# Altium PCB Measuring_distance_ultrasonic_PCB.PcbDoc
Units mil, origin at the board's own origin, x right, y up, seen from the top; angles counter-clockwise.
Board outline 1525 x 3215 mil, 2 copper layers (Top Layer, Bottom Layer); 12 components, 14 nets, 69 pads, 1 vias.
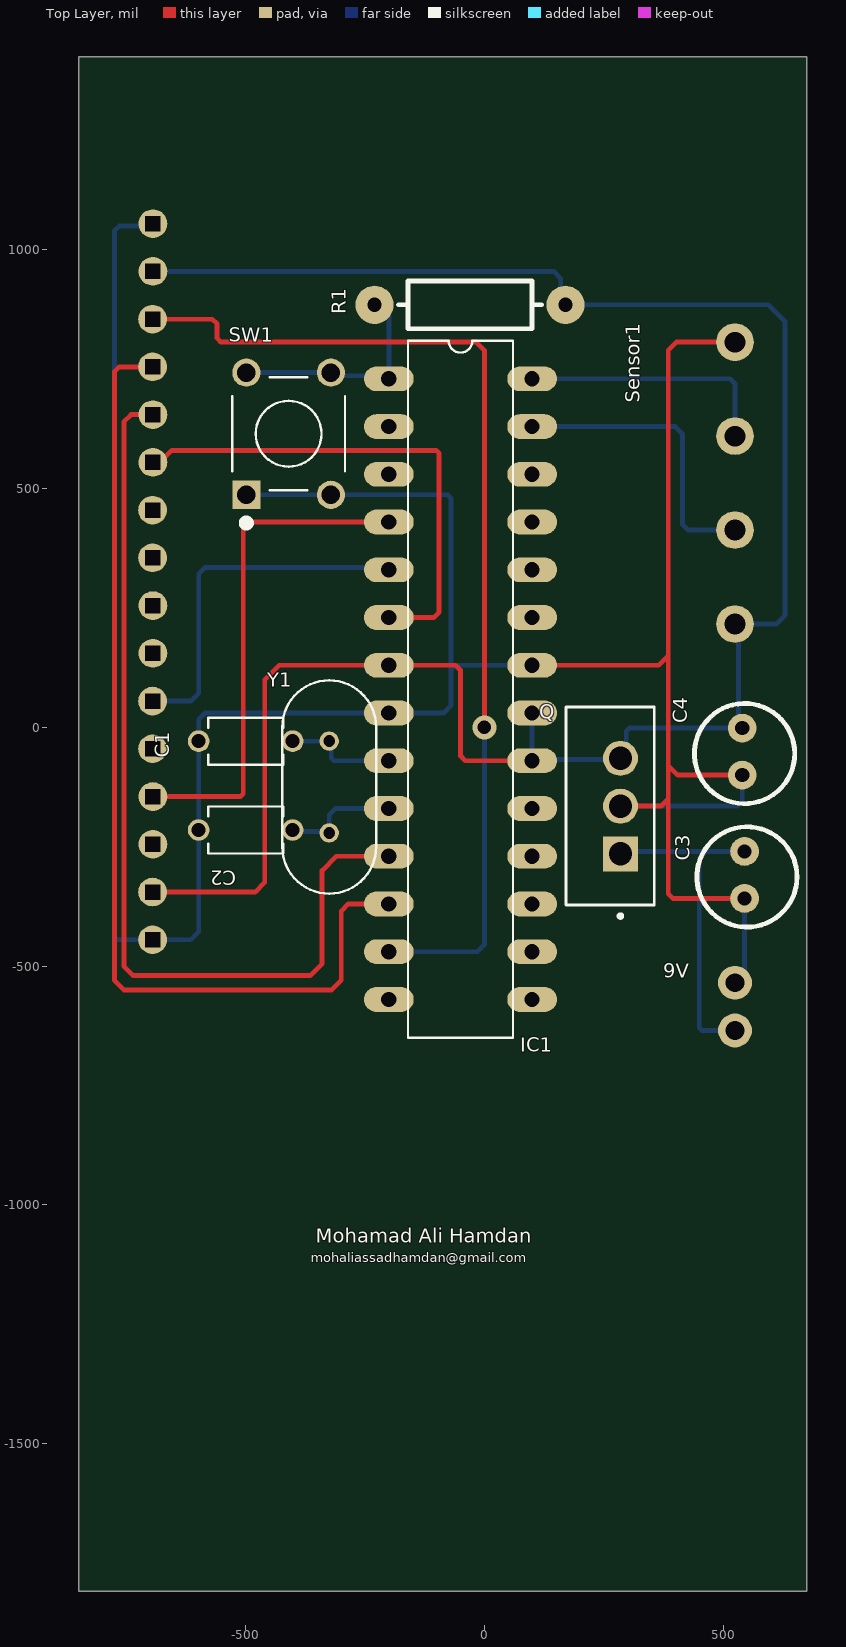
[diagram p0: Top Layer view]
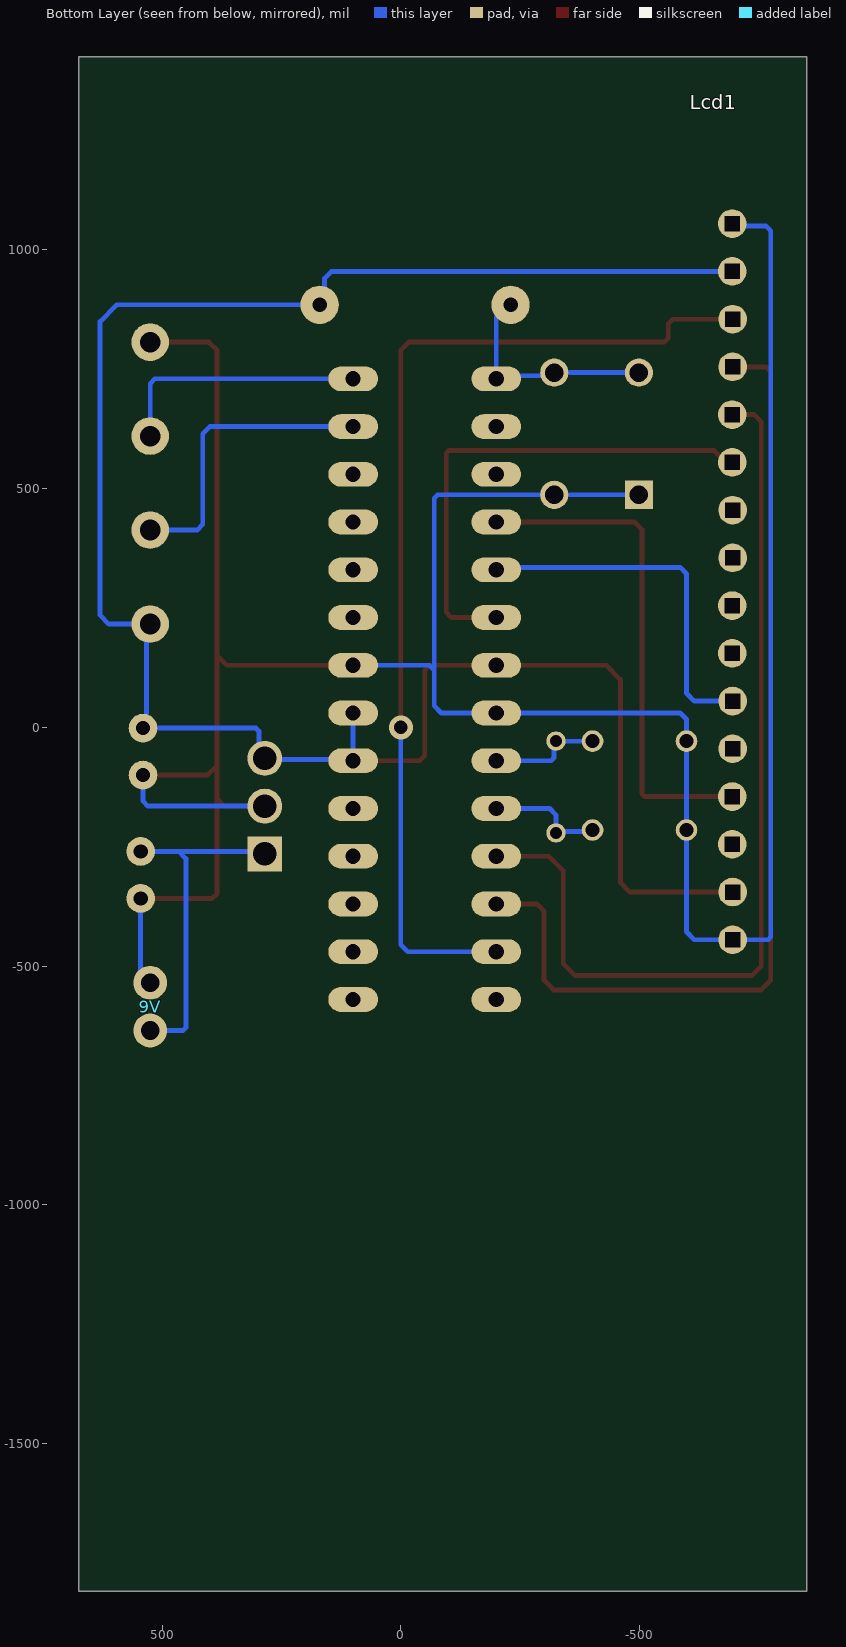
[diagram p1: Bottom Layer view, seen from below]
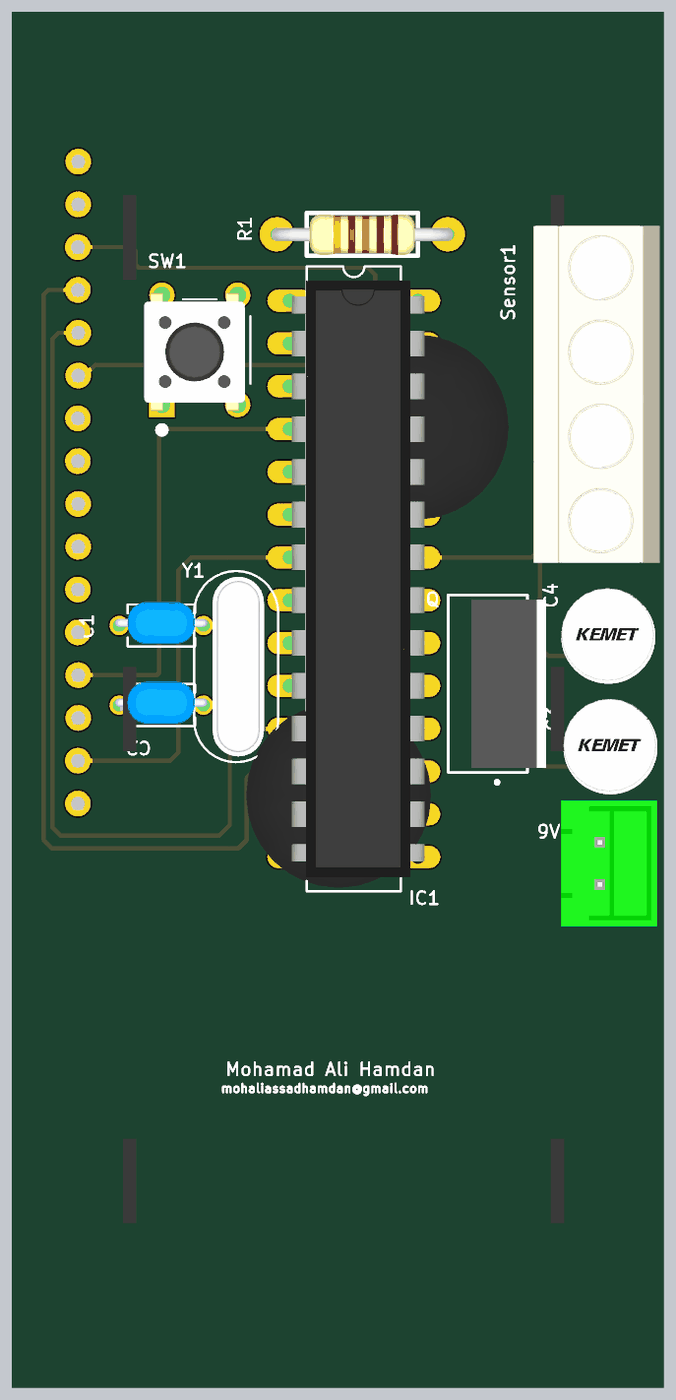
[diagram p2: 3D render of the assembled board from above, using the file's embedded part models]

## Layer stack, top to bottom
Top Solder: solder mask 0.4, Solder Resist, Dk 3.5
Top Layer: signal copper 1.4
Dielectric 1: dielectric 12.6, FR-4, Dk 4.8
Bottom Layer: signal copper 1.4
Bottom Solder: solder mask 0.4, Solder Resist, Dk 3.5

## Board outline
-850,-1810 675,-1810 675,1405 -850,1405

## Design rules (kind name [scope] priority, off if disabled: settings)
Clearance [All] p1: gap=10 ignorepadtopadclearanceinfootprint=FALSE except(0: Arc-Hole Track-Hole SMDPad-Hole THPad-Hole Via-Hole Fill-Hole Poly-Hole Region-Hole Text-Hole)
PolygonConnect [All] p1: connectstyle=Relief reliefconductorwidth=10 reliefentries=4 polygonreliefangle="90 Angle" airgapwidth=10
RoutingVias [All] p1: holewidth=28 width=50 viastyle="Through Hole" minholewidth=28 minwidth=50 maxholewidth=28 maxwidth=50
SolderMaskExpansion [All] p1: expansion=4
Width [All] p1: maxlimit=10 minlimit=10 preferedwidth=10
30 further rules are at their usual default settings.

## Components (designator, comment, footprint, x,y, rotation, side; value= is the part's Value field where it differs from the comment)
9V "Header 2" Connector_green_2pins 525,-535 r270 bottom
C1 "14pF" CAP_RDER71H333K0M1H03A -500,-28.94 r0 top
C2 "14pF" CAP_RDER71H333K0M1H03A -500,-215 r0 top
C3 "Cap2" Capacitor_polarized_100uF 545,-358.43 r90 top value=0.22uF
C4 "Cap2" Capacitor_polarized_100uF 540,-100 r90 top value=0.1uF
IC1 "ATMEGA328-PU" DIL28 -50,80 r0 top
Lcd1 "Header 16" LCD_16_2 -694.21,1055 r270 bottom
Q "LM7805CT/NOPB" LM7805 285,-265 r90 top
R1 "Res1" resistor -30,885 r180 top value=10K
Sensor1 "Header 4" header_4 525,216.3 r90 top
SW1 "FSM8JH" SW_FSM8JH -410,615 r90 top
Y1 "16MHZ" XTAL_ECS-160-20-4VX -325,-125 r90 top

## Footprints (in the part's own frame and the unit in brackets; to place one, negate y for a bottom-side part, rotate by r counter-clockwise, add the part's x,y. Pads: shape width x height; smd on the part's side, far side on the other; paste and mask are expansions set on the pad)
CAP_RDER71H333K0M1H03A [mm]
  round 1.15 hole 0.75: 1(-2.5,0) 2(2.5,0)
  silkscreen extent -2,-1.25 2,1.25, body extent -2.75,-1.1 3.68,4.32, height 7
Capacitor_polarized_100uF [mil] "Capacitor_polarized_100uF 25V"
  round 60 hole 30: +(98.43,0) -(0,0)
  silkscreen extent -60,-110 150,100, body extent -58,-112 158,105, height 591
Connector_green_2pins [mm] "Connector_green_2pins"
  round 1.8 hole 1: 1(0,0) 2(2.54,0)
  body extent -2.48,-3.41 5.02,2.29, height 3.3
DIL28 [mil]
  oval 104x52 hole 32: 1(-150,650) 2(-150,550) 3(-150,450) 4(-150,350) 5(-150,250) 6(-150,150) 7(-150,50) 8(-150,-50) 9(-150,-150) 10(-150,-250) 11(-150,-350) 12(-150,-450) 13(-150,-550) 14(-150,-650) 15(150,-650) 16(150,-550) 17(150,-450) 18(150,-350) 19(150,-250) 20(150,-150) 21(150,-50) 22(150,50) 23(150,150) 24(150,250) 25(150,350) 26(150,450) 27(150,550) 28(150,650)
  silkscreen extent -110,-730 110,730, body extent -145,-697 165,697, height 205
header_4 [mm] "header_4"
  round 2 hole 1.1: 1(0,0) 2(5,0) 3(10,0) 4(15,0)
  body extent -2.51,-3.56 17.49,3.94, height 12
LCD_16_2 [mil] "LCD_16_2"
  round 60 hole 31.5 square: 1(0,0) 2(100,0) 3(200,0.79) 4(300,0.79) 5(400,0) 6(500,0) 7(600,0.79) 8(700,0.79) 9(800,0) 10(900,0) 11(1000,0.79) 12(1100,0.79) 13(1200,0) 14(1300,0) 15(1400,0.79) 16(1500,0.79)
  body extent -315,-1317 2835,100, height 433
LM7805 [mm] "LM7805"
  rect 1.86x1.86 hole 1.24: 1(0,0)
  round 1.86 hole 1.24: 2(2.54,0) 3(5.08,0)
  silkscreen extent -3.41,-1.8 7.81,2.9, body extent -2.44,-2.92 7.52,1.52, height 19.75
resistor [mil]
  round 80 hole 30: 1(200,0) 2(-200,0)
  silkscreen extent -150,-50 150,50, body extent -213,-46 213,48, height 91
SW_FSM8JH [mm]
  rect 1.498x1.498 hole 0.99: 1(-3.25,2.25)
  round 1.498 hole 0.99: 2(-3.25,-2.25) 3(3.25,2.25) 4(3.25,-2.25)
  silkscreen extent -4.95,-3 3,3, body extent -4.07,-2.69 3.82,3.3, height 9.5
XTAL_ECS-160-20-4VX [mm]
  round 1.03 hole 0.63: 1(-2.44,0) 2(2.44,0)
  silkscreen extent -5.68,-2.5 5.68,2.5, body extent -5.33,-1.65 5.33,1.4, height 4.09

## Part data
9V: "Header, 2-Pin", LatestRevisionDate=17-Jul-2002, LatestRevisionNote="Re-released for DXP Platform.", Publisher="Altium Limited"
C1 C2: library part RDER71H333K0M1H03A, "Lead capacitor X7R(EIA) with Capacitance 33000pF, Rated Voltage 50Vdc", Package="Radial Murata", Availability=Warning, BuyPart=22PF, MF=Murata, Mouser-Purchase-URL=https://snapeda.com/shop?store=Mouser&id=4546735, MP=RDER71H333K0M1H03A, Price=None, SnapEDA_Link=https://www.snapeda.com/parts/RDER71H333K0M1H03A/Murata/view-part/4546735/?ref=snap
C3 C4: "Capacitor", PackageDescription="Capacitor; 2 Leads", PackageReference=CAPR5-4X5, Published=23-Sep-2002, Publisher="Altium Limited"
IC1: "AVR AVR® ATmega Microcontroller IC 8-Bit 20MHz 32KB _16K x 16_ FLASH 28-PDIP", Package="DIP-28 Microchip Technology", Availability=Unavailable, MF="Microchip Technology", MP=ATMEGA328-PU, Price=None, SnapEDA_Link=https://www.snapeda.com/parts/ATMEGA328-PU/Microchip/view-part/4327846/?ref=snap
Lcd1: "Header, 16-Pin", LatestRevisionDate=17-Jul-2002, LatestRevisionNote="Re-released for DXP Platform.", Publisher="Altium Limited"
Q: "Linear Voltage Regulator IC 1 Output 1A TO-220-3", Package="TO-220 ON Semiconductor", Availability=Unavailable, MF="ON Semiconductor", MP=LM7805CT, Price=None, SnapEDA_Link=https://www.snapeda.com/parts/LM7805CT/ON%20Semiconductor/view-part/546231/?ref=snap
R1: "Resistor", LatestRevisionDate=17-Jul-2002, LatestRevisionNote="Re-released for DXP Platform.", PackageDescription="Axial Device, Thru-Hole; 2 Leads; 0.3 in Pin Spacing", PackageReference=AXIAL-0.3, Published=8-Jun-2000, Publisher="Altium Limited"
Sensor1: "Header, 4-Pin", LatestRevisionDate=17-Jul-2002, LatestRevisionNote="Re-released for DXP Platform.", Publisher="Altium Limited"
SW1: "Tactile Switch SPST-NO Top Actuated Through Hole", Package=None, Availability=Unavailable, MF="TE Connectivity", MP=FSM8JH, Price=None, SnapEDA_Link=https://www.snapeda.com/parts/FSM8JH/TE%20Connectivity%20ALCOSWITCH%20Switches/view-part/139741/?ref=snap, TE_purchase_URL=https://www.te.com/usa-en/product-FSM8JH.html?te_bu=Cor&te_type=disp&te_campaign=seda_glo_cor-seda-global-disp-prtnr-fy19-seda-model-bom-cta_sma-317_1&elqCampaignId=32493
Y1: library part ECS-160-20-4VX, "16MHz ±30ppm Crystal 20pF 50 Ohms HC-49/US", Package="HC49/US ECS International", Availability=Unavailable, MF="ECS Inc.", MP=ECS-160-20-4VX, Price=None, SnapEDA_Link=https://www.snapeda.com/parts/ECS-160-20-4VX/ECS%20Inc./view-part/47293/?ref=snap

## Via types
v1: diameter 50, hole 28, Top Layer to Bottom Layer, 1 vias

## Nets (pads, with @x,y where several pads share a name; then routed paths per layer and width w, separated by ;. In a path a pad name is that pad's centre, name@x,y a point inside that pad or via, vN(x,y) a via of type N, cw(c..) or ccw(c..) an arc to the next point about the centre after c; other vN are vias at no path point)
+5V: C4.+ IC1.7 IC1.20 IC1.21 Lcd1.2 Lcd1.15 Q.3 R1.2 Sensor1.1 | length 4369.6
  Top Layer w10: Lcd1.15 -480,-345 -460,-325 -460,100 -430,130 IC1.7 -60,130 -50,120 -50,-60 -40,-70 IC1.20
  Bottom Layer w10: Lcd1.2 145,955 160,940 160,895 R1.2 595,885 630,850 630,235 611.3,216.3 Sensor1.1 532.5,208.8 532.5,5.93 C4.+ 303.43,-1.57 297.1,-7.9 297.1,-52.9 Q.3 282.5,-67.5 102.5,-67.5 IC1.20 IC1.21
GND: 9V.1 C1.1 C2.1 C3.- C4.- IC1.8 IC1.22 Lcd1.1 Lcd1.16 Q.2 Sensor1.4 SW1.1 SW1.2 | length 6289.2
  Top Layer w10: IC1.22 365,130 385,150 ; Q.2 370,-165 385,-150 ; Sensor1.4 401.85,806.85 385,790 385,150 ; C4.- 405,-100 385,-80 ; C3.- 395,-358.43 385,-348.43 385,-150 ; 385,-150 385,-80 ; 385,-80 385,150
  Bottom Layer w10: Lcd1.1 -699.21,1050 -765,1050 -775,1040 -775,-439.14 -769.14,-445 Lcd1.16 -615,-445 -598.43,-428.43 C2.1 C1.1 -598.43,16.57 -585,30 IC1.8 -85,30 -70,45 -70,120 ; SW1.1 SW1.2 -77.05,487.05 -70,480 -70,120 ; IC1.22 -60,130 -70,120 ; Q.2 530,-165 540,-155 C4.- ; 9V.1 545,-515 C3.-
Net9V_2: 9V.2 C3.+ Q.1 | length 714.9
  Bottom Layer w10: Q.1 290,-260 465,-260 ; 9V.2 455.86,-635 450,-629.14 450,-275 465,-260 ; C3.+ 465,-260
NetC1_2: C1.2 IC1.9 Y1.2 | length 236.8
  Bottom Layer w10: C1.2 Y1.2 -320.86,-33.08 -320.86,-64.14 -315,-70 IC1.9
NetC2_2: C2.2 IC1.10 Y1.1 | length 247.2
  Bottom Layer w10: C2.2 -398.54,-218.03 -328.03,-218.03 Y1.1 -325,-183.58 -311.42,-170 IC1.10
NetIC1_1: IC1.1 R1.1 SW1.3 SW1.4 | length 474.3
  Bottom Layer w10: SW1.3 SW1.4 -314.94,736.48 -206.48,736.48 IC1.1 -200,860 -225,885 R1.1
NetIC1_4: IC1.4 Lcd1.13 | length 1057
  Top Layer w10: Lcd1.13 -510.86,-145 -505,-139.14 -505,415 -490,430 IC1.4
NetIC1_5: IC1.5 Lcd1.11 | length 759.5
  Bottom Layer w10: Lcd1.11 -615,55 -598.43,71.57 -598.43,321.57 -585,335 -205,335 IC1.5
NetIC1_6: IC1.6 Lcd1.6 | length 1054.8
  Top Layer w10: Lcd1.6 -680,555 -655,580 -100.86,580 -95,574.14 -95,240.86 -105.86,230 IC1.6
NetIC1_11: IC1.11 Lcd1.5 | length 1988.1
  Top Layer w10: Lcd1.5 -740,655 -755,640 -755,-500 -735,-520 -365,-520 -340,-495 -340,-300 -310,-270 IC1.11
NetIC1_12: IC1.12 Lcd1.4 | length 2101.9
  Top Layer w10: Lcd1.4 -765,755 -775,745 -775,-530 -755,-550 -320,-550 -300,-530 -300,-385 -285,-370 IC1.12
NetIC1_13: IC1.13 Lcd1.3 | length 2190.7
  Top Layer w10: Lcd1.3 -570,855 -560,845 -560,815 -551.85,806.85 -16.85,806.85 0,790 v1(0,0)
  Bottom Layer w10: IC1.13 -15,-470 0,-455 v1(0,0)
NetIC1_27: IC1.27 Sensor1.2 | length 626.1
  Bottom Layer w10: IC1.27 400,630 415,615 415,425 426.85,413.15 Sensor1.2
NetIC1_28: IC1.28 Sensor1.3 | length 539.1
  Bottom Layer w10: IC1.28 515,730 525,720 Sensor1.3
pads on no net: IC1.2 IC1.3 IC1.14 IC1.15 IC1.16 IC1.17 IC1.18 IC1.19 IC1.23 IC1.24 IC1.25 IC1.26 Lcd1.7 Lcd1.8 Lcd1.9 Lcd1.10 Lcd1.12 Lcd1.14

## Silkscreen, mask and mechanical layers (free items; w line width, h text height)
Top Overlay:
  text "Mohamad Ali Hamdan" at -353.4,-1080 h30
  text "mohaliassadhamdan@gmail.com" at -363.4,-1120 h20
Mechanical 13:
  lines w19.68: -810,-1795 665,-1795 665,1385 -810,1385 -810,-1795